# EAGLE board buttonboard (EAGLE 8.5.0)
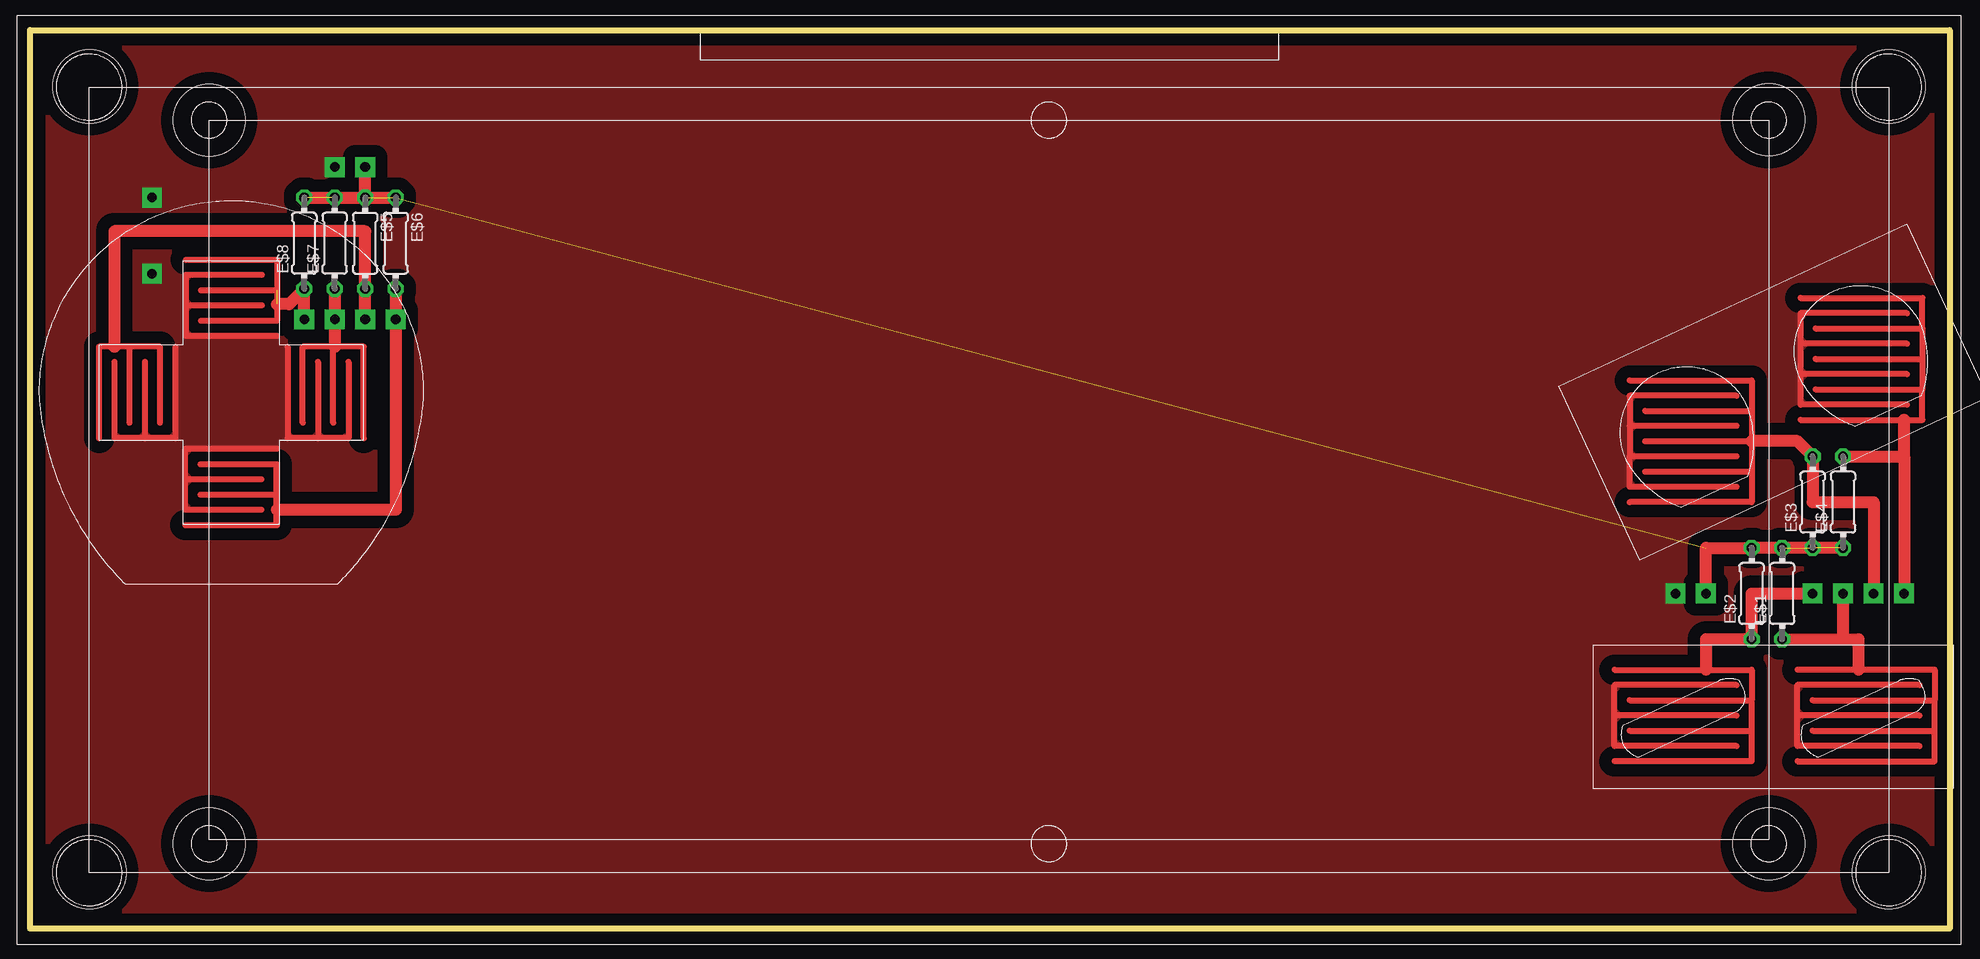
[diagram p0: board, top side]
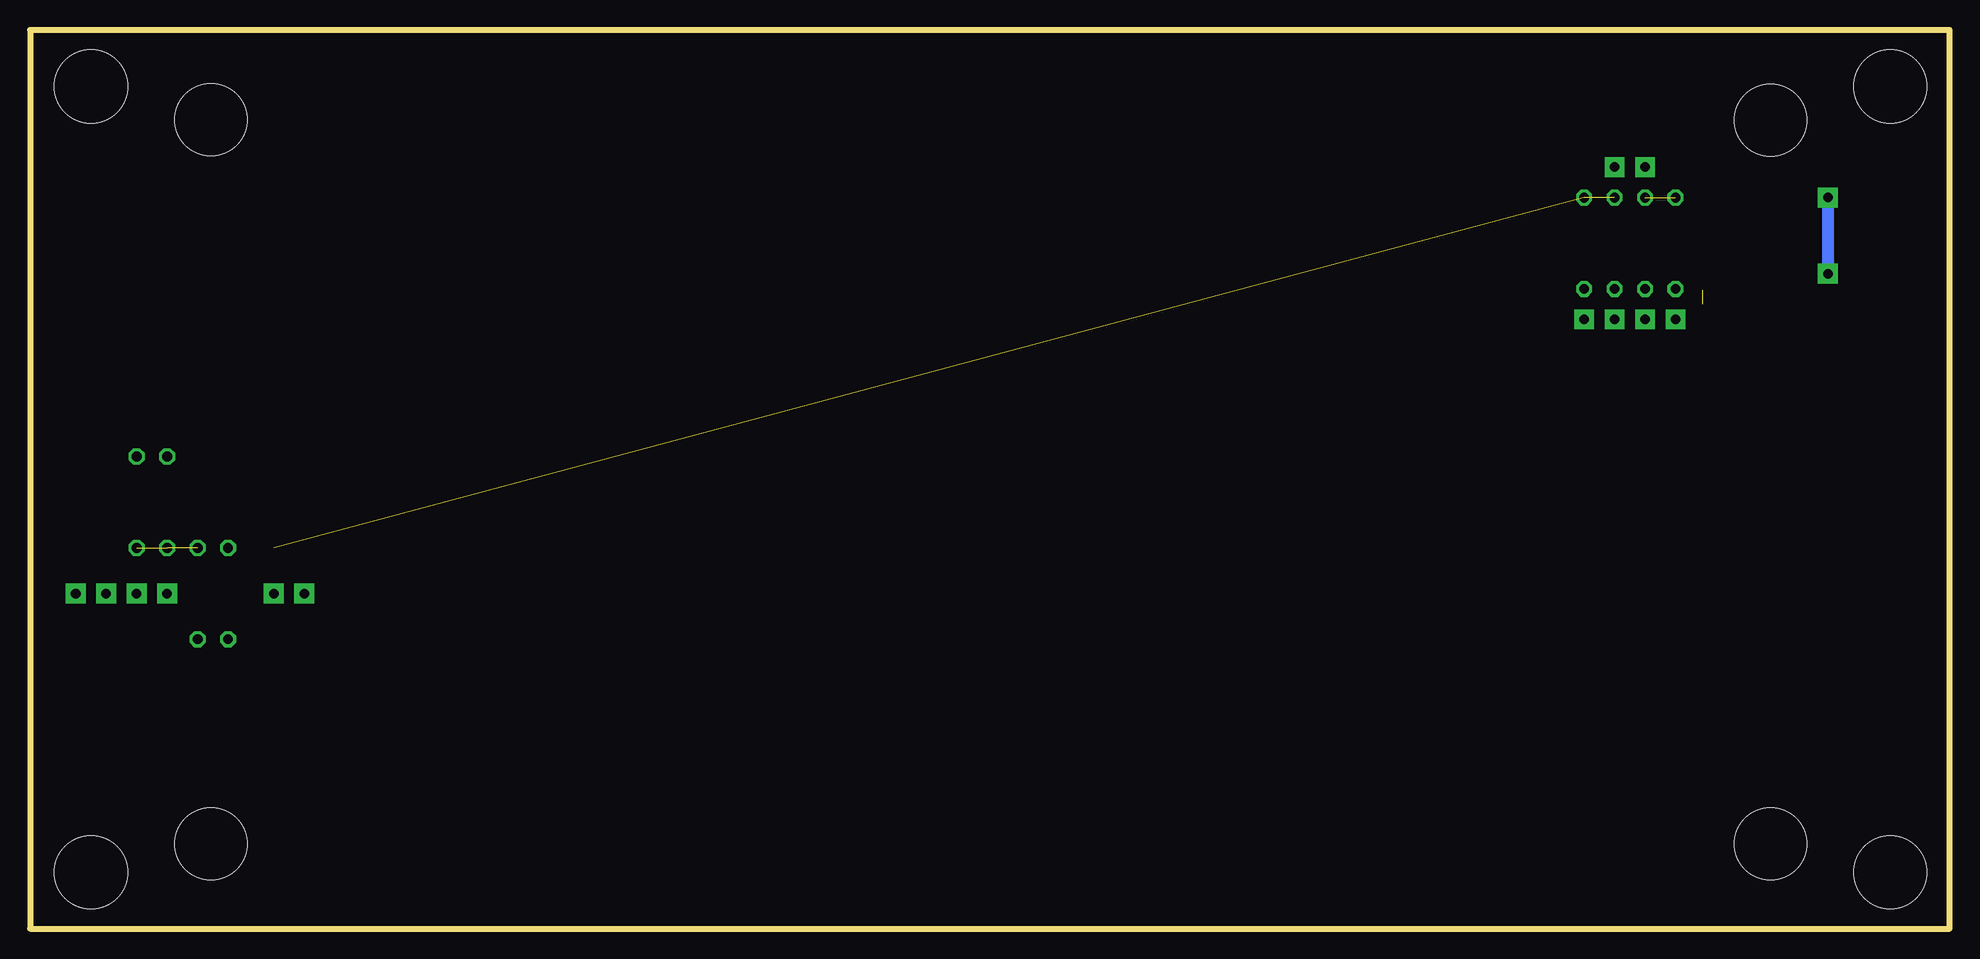
[diagram p1: board, bottom side, seen from below]

Size 160.02 x 74.93 mm. Coordinates in mm from the lower left corner, seen from the top.
Outline: 0,74.93 160.02,74.93 160.02,0 0,0 0,74.93
Copper layers (1*16): Top 0.035mm / dielectric 1.5mm / Bottom 0.035mm
Design rules "default *": minimum track width 6mil, minimum drill 0.35mm, track to track 10mil, track to pad 10mil, pad to pad 10mil, via to via 10mil, smd to smd 10mil, copper to edge 30mil, drill to drill 10mil, minimum pad ring 10mil, minimum via ring 8mil, stop-mask expansion 4mil, vias tented up to drill 0mil, thermal gap 10mil
Holes 6.1 mm at 4.95,70.23 154.94,70.23 154.94,4.7 4.95,4.7
Holes 5.99 mm at 14.94,67.41 14.94,7.09 144.93,7.09 144.93,67.44

## Footprints (pad centres in the part's own frame; a part is rotated, then mirrored left to right if it is on the bottom)
0204/7 = drill 0.813 octagon: 1 -3.81,0; 2 3.81,0

## Placement (x,y rotation side)
E$1  [0204/7]  146.05,27.94 90 top
E$2  [0204/7]  143.51,27.94 90 top
E$3  [0204/7]  148.59,35.56 90 top
E$4  [0204/7]  151.13,35.56 90 top
E$5  [0204/7]  27.94,57.15 270 top
E$6  [0204/7]  30.48,57.15 270 top
E$7  [0204/7]  25.4,57.15 90 top
E$8  [0204/7]  22.86,57.15 90 top

## Library data of the parts
E$1-E$8 = BeagleBone_Black_Wireless

## Nets
BTN_A: E$3.2
BTN_B: E$4.2
BTN_DOWN: E$6.2
BTN_LEFT: E$7.1
BTN_RIGHT: E$8.1
BTN_SELECT: E$2.1
BTN_START: E$1.1
BTN_UP: E$5.2
VCC: E$1.2 E$2.2 E$3.1 E$4.1 E$5.1 E$6.1 E$7.2 E$8.2

## Tracks (layer width: path | path; a pad name or v marks a point on that pad's centre or on a via)
BTN_A  (via drill 0.8 pad 1.65)
  Top 0.508: 133.35,45.72 143.51,45.72 143.51,43.18 | 134.62,43.18 143.51,43.18 | 134.62,40.64 143.51,40.64 | 143.51,43.18 143.51,40.64 | 134.62,38.1 143.51,38.1 | 143.51,40.64 143.51,38.1 | 133.35,35.56 143.51,35.56 143.51,38.1
  Top 1.016: 143.51,40.64 147.32,40.64 E$3.2 148.59,35.56 153.67,35.56 v153.67,27.94
BTN_B  (via drill 0.8 pad 1.65)
  Top 0.508: 147.57,42.42 156.21,42.42 157.73,42.42 157.73,44.96 | 148.84,50.04 157.73,50.04 | 148.84,47.5 157.73,47.5 | 157.73,50.04 157.73,47.5 | 148.84,44.96 157.73,44.96 | 157.73,47.5 157.73,44.96 | 147.57,52.58 157.73,52.58 157.73,50.04
  Top 1.016: E$4.2 156.21,39.37 | 156.21,39.37 v156.21,27.94 | 156.21,39.37 156.21,42.42
BTN_DOWN  (via drill 0.8 pad 1.65)
  Top 0.508: 12.95,33.65 20.57,33.65 20.57,34.92 20.57,36.2 | 14.22,36.2 20.57,36.2 | 14.22,38.73 20.57,38.73 20.57,36.2
  Top 1.016: E$6.2 v30.48,50.8 30.48,34.92 20.57,34.92
BTN_LEFT  (via drill 0.8 pad 1.65)
  Top 0.508: 27.81,40.89 27.81,48.51 25.4,48.51 25.27,48.51 | 25.27,42.16 25.27,48.51 | 22.73,42.16 22.73,48.51 25.27,48.51
  Top 1.016: E$7.1 v25.4,50.8 25.4,48.51
BTN_RIGHT  (via drill 0.8 pad 1.65)  (1 unrouted)
  Top 0.508: 12.98,55.78 20.6,55.78 20.6,52.07 20.6,50.7 14.25,50.7 | 14.25,53.24 20.6,53.24
  Top 1.016: 20.6,52.07 21.59,52.07 E$8.1 v22.86,50.8
BTN_SELECT  (via drill 0.8 pad 1.65)
  Top 0.508: 133.35,16.51 143.51,16.51 | 143.51,16.51 143.51,13.97 132.08,13.97 | 133.35,19.05 143.51,19.05 | 143.51,16.51 143.51,19.05 | 143.51,19.05 143.51,21.59 139.7,21.59 132.08,21.59
  Top 1.016: v148.59,27.94 143.51,27.94 E$2.1 139.7,24.13 139.7,21.59
BTN_START  (via drill 0.8 pad 1.65)
  Top 0.508: 147.32,13.97 158.75,13.97 158.75,16.51 | 148.59,16.51 158.75,16.51 | 148.59,19.05 158.75,19.05 | 158.75,16.51 158.75,19.05 | 158.75,19.05 158.75,21.59 152.4,21.59 147.32,21.59
  Top 1.016: 151.13,24.13 v151.13,27.94 | E$1.1 151.13,24.13 | 151.13,24.13 152.4,24.13 152.4,21.59
BTN_UP  (via drill 0.8 pad 1.65)
  Top 0.508: 5.77,40.89 5.77,48.51 7.04,48.51 8.31,48.51 | 8.31,42.16 8.31,48.51 | 8.31,48.51 10.85,48.51 10.85,42.16
  Top 1.016: v27.94,50.8 E$5.2 27.94,58.14 7.04,58.14 7.04,48.51
GND  (via drill 0.8 pad 1.65)
  Top 0.508: 12.12,48.51 12.12,40.89 9.58,40.89 | 9.58,47.24 9.58,40.89 | 7.04,47.24 7.04,40.89 9.58,40.89 | 19.33,54.51 12.98,54.51 12.98,51.97 | 19.33,51.97 12.98,51.97 | 12.98,51.97 12.98,49.43 20.6,49.43 | 26.54,47.24 26.54,40.89 24,40.89 | 24,47.24 24,40.89 | 21.46,48.51 21.46,40.89 24,40.89 | 20.57,40 12.95,40 12.95,37.46 | 19.3,37.46 12.95,37.46 | 19.3,34.92 12.95,34.92 12.95,37.46 | 142.24,36.83 133.35,36.83 133.35,39.37 | 142.24,44.45 133.35,44.45 133.35,41.91 | 142.24,41.91 133.35,41.91 | 142.24,39.37 133.35,39.37 | 133.35,41.91 133.35,39.37 | 156.46,51.31 147.57,51.31 147.57,48.77 | 156.46,48.77 147.57,48.77 | 156.46,46.23 147.57,46.23 | 147.57,48.77 147.57,46.23 | 156.46,43.69 147.57,43.69 147.57,46.23 | 142.24,15.24 132.08,15.24 132.08,17.78 | 142.24,17.78 132.08,17.78 | 142.24,20.32 132.08,20.32 132.08,17.78 | 157.48,15.24 147.32,15.24 147.32,17.78 | 157.48,17.78 147.32,17.78 | 157.48,20.32 147.32,20.32 147.32,17.78
  Bottom 1.016: v10.16,60.96 v10.16,54.61
  other vias: 25.4,63.5 137.16,27.94
  pour Top (isolate 1.016, no thermals): -1.27,76.2 -1.27,-1.27 161.29,-1.27 161.29,76.2
VCC  (via drill 0.8 pad 1.65)  (5 unrouted)
  Top 1.016: E$4.1 E$2.2 139.7,31.75 v139.7,27.94 | E$8.2 E$6.1 | E$5.1 v27.94,63.5